# EAGLE board ModuleCarrier-Murata-ABZ-v1.0.0 (EAGLE 7.7.0)
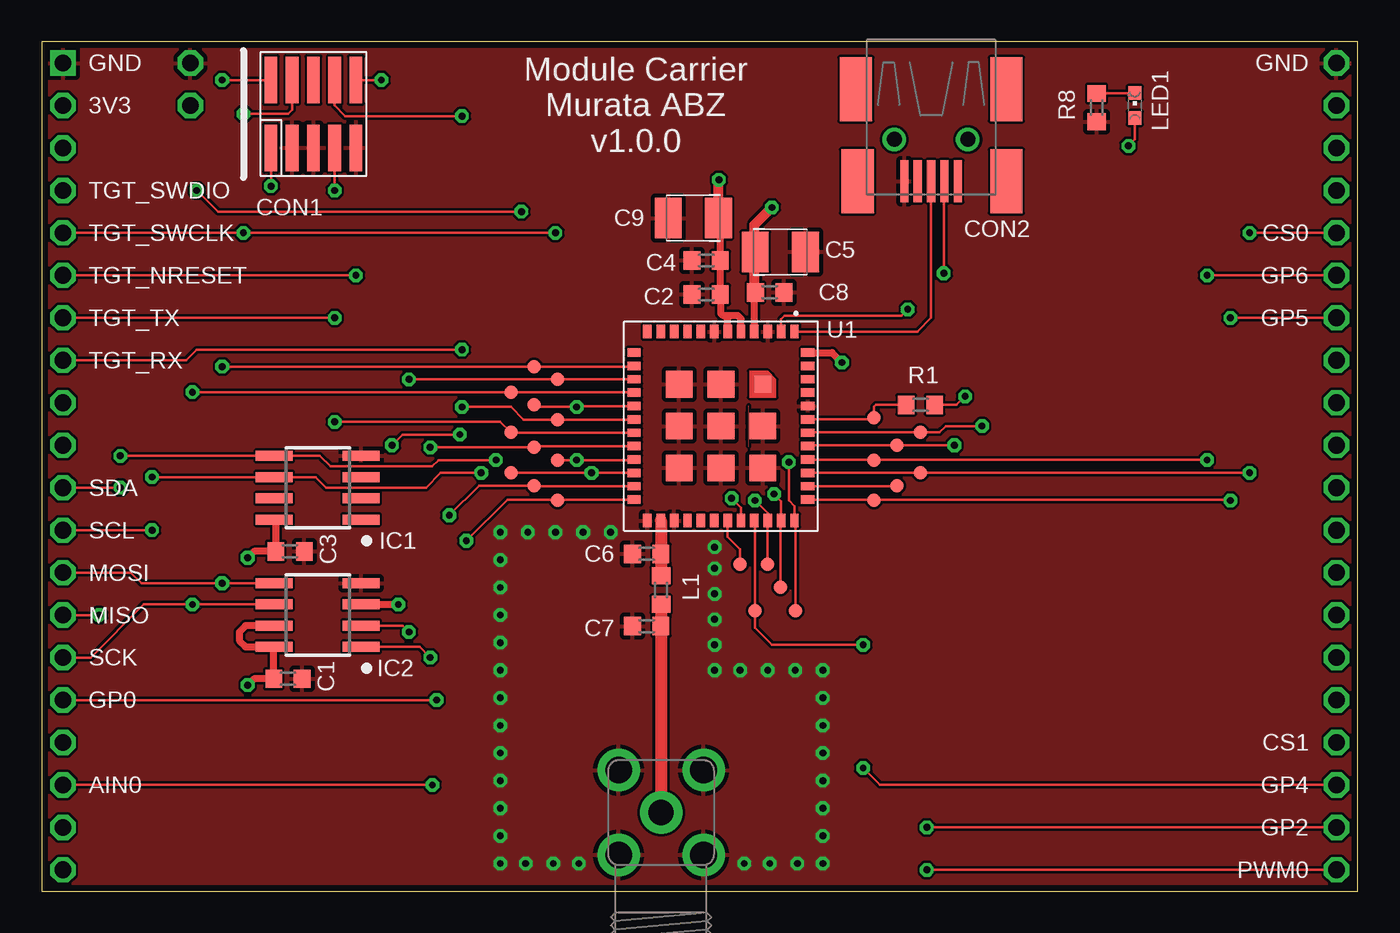
[diagram p0: board, top side]
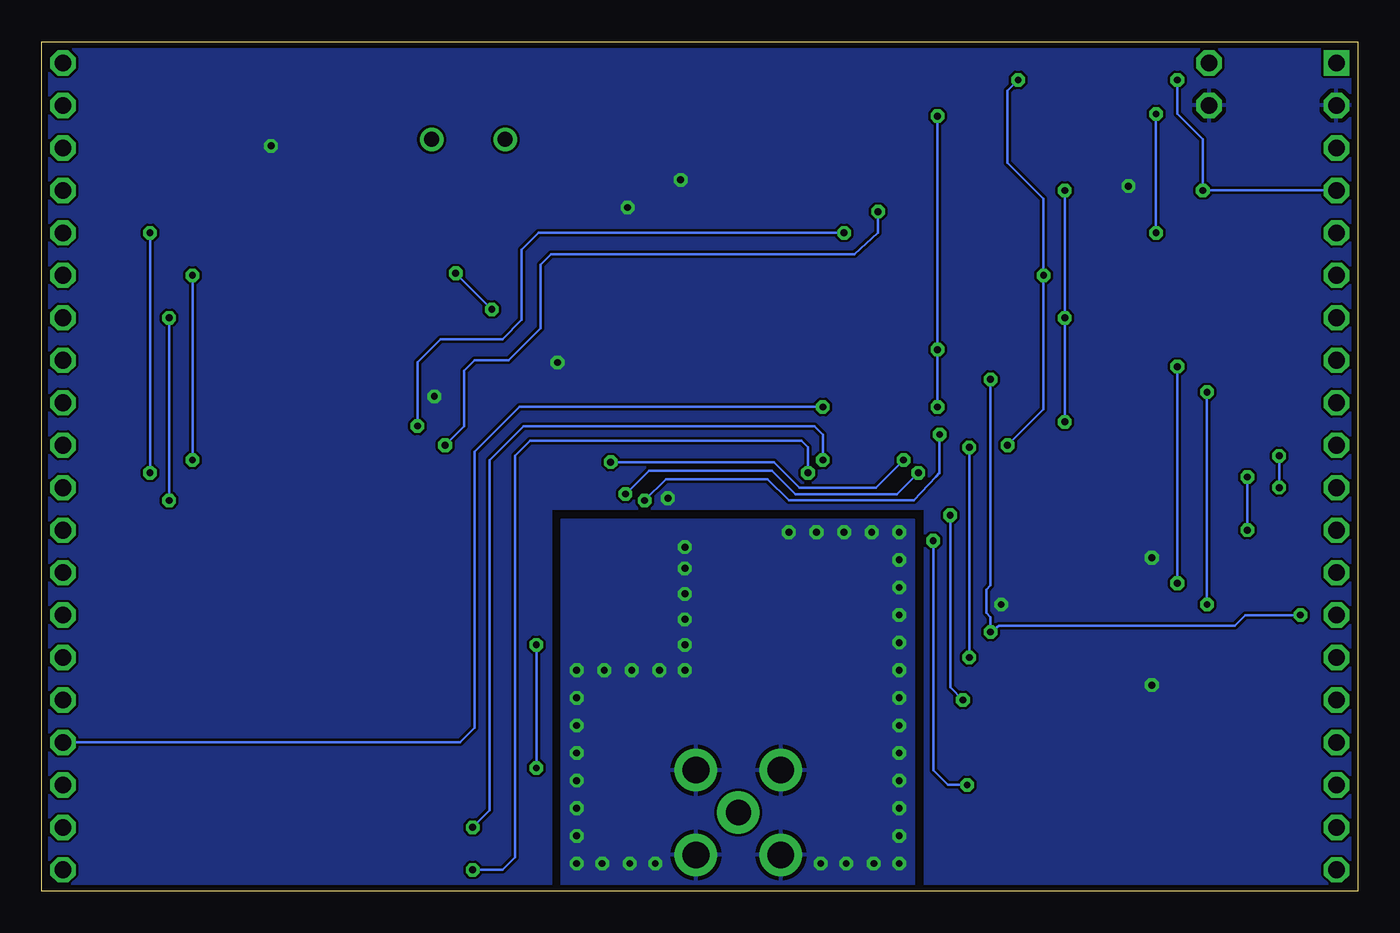
[diagram p1: board, bottom side, seen from below]

Size 78.74 x 50.8 mm. Coordinates in mm from the lower left corner, seen from the top.
Copper layers ((1*16)): Top 0.035mm / dielectric 0.8mm / Bottom 0.035mm
Design rules "mbed-HDK-6-6-2-layer *": minimum track width 6mil, minimum drill 9mil, track to track 6mil, track to pad 6mil, pad to pad 6mil, via to via 6mil, smd to smd 6mil, copper to edge 15mil, drill to drill 8mil, minimum pad ring 10mil, minimum via ring 8mil, stop-mask expansion 4mil, vias tented up to drill 0mil, thermal gap 10mil

## Footprints (pad centres in the part's own frame; a part is rotated, then mirrored left to right if it is on the bottom)
0603 = smd 1 x 1.1: 1 -0.85,0; 2 0.85,0
SMC_B = smd 1.6 x 2.4: + -1.5,0; - 1.5,0
FTSH-105-02 = smd 0.762 x 2.794: 1 0.381,-2.032; 2 0.381,2.032; 3 1.651,-2.032; 4 1.651,2.032; 5 2.921,-2.032; 6 2.921,2.032; 7 4.191,-2.032; 8 4.191,2.032; 9 5.461,-2.032; 10 5.461,2.032
USB-MINI-B-H = smd 2.5 x 0.5: D+ 2.5,0; D- 2.5,0.8; GND 2.5,-1.6; ID 2.5,-0.8; VBUS 2.5,1.6 | smd 3.81 x 1.93: GND@1 -3,4.5; GND@2 2.5,4.5; GND@3 -3,-4.5; GND@4 2.5,-4.4 | drill 0.9: P$5 0,2.2; P$6 0,-2.2
SO8 = smd 0.6 x 2.2: 1 -1.905,-2.6; 2 -0.635,-2.6; 3 0.635,-2.6; 4 1.905,-2.6; 5 1.905,2.6; 6 0.635,2.6; 7 -0.635,2.6; 8 -1.905,2.6
CHIPLED_0603 = smd 0.8 x 0.8: A 0,-0.75; C 0,0.75
MODULE_DAUGHTER = drill 1 square: 1 0,0 | drill 1 octagon: 2 0,-2.54; 3 0,-5.08; 4 0,-7.62; 5 0,-10.16; 6 0,-12.7; 7 0,-15.24; 8 0,-17.78; 9 0,-20.32; 10 0,-22.86; 11 0,-25.4; 12 0,-27.94; 13 0,-30.48; 14 0,-33.02; 15 0,-35.56; 16 0,-38.1; 17 0,-40.64; 18 0,-43.18; 19 0,-45.72; 20 0,-48.26; 21 76.2,-48.26; 22 76.2,-45.72; 23 76.2,-43.18; 24 76.2,-40.64; 25 76.2,-38.1; 26 76.2,-35.56; 27 76.2,-33.02; 28 76.2,-30.48; 29 76.2,-27.94; 30 76.2,-25.4; 31 76.2,-22.86; 32 76.2,-20.32; 33 76.2,-17.78; 34 76.2,-15.24; 35 76.2,-12.7; 36 76.2,-10.16; 37 76.2,-7.62; 38 76.2,-5.08; 39 76.2,-2.54; 40 76.2,0
TP50-PTH = drill 1 octagon: TP 0,0
TP08R = smd 0.8 x 0.8: TP 0,0
XCVR_CMWX1ZZABZ-078 = smd 0.8 x 0.5: 1 -5.65,4.4; 2 -5.65,3.6; 3 -5.65,2.8; 4 -5.65,2; 5 -5.65,1.2; 6 -5.65,0.4; 7 -5.65,-0.4; 8 -5.65,-1.2; 9 -5.65,-2; 10 -5.65,-2.8; 11 -5.65,-3.6; 12 -5.65,-4.4; 25 5.65,-4.4; 26 5.65,-3.6; 27 5.65,-2.8; 28 5.65,-2; 29 5.65,-1.2; 30 5.65,-0.4; 31 5.65,0.4; 32 5.65,1.2; 33 5.65,2; 34 5.65,2.8; 35 5.65,3.6; 36 5.65,4.4 | smd 0.5 x 0.8: 13 -4.4,-5.2; 14 -3.6,-5.2; 15 -2.8,-5.2; 16 -2,-5.2; 17 -1.2,-5.2; 18 -0.4,-5.2; 19 0.4,-5.2; 20 1.2,-5.2; 21 2,-5.2; 22 2.8,-5.2; 23 3.6,-5.2; 24 4.4,-5.2; 37 4.4,5.2; 38 3.6,5.2; 39 2.8,5.2; 40 2,5.2; 41 1.2,5.2; 42 0.4,5.2; 43 -0.4,5.2; 44 -1.2,5.2; 45 -2,5.2; 46 -2.8,5.2; 47 -3.6,5.2; 48 -4.4,5.2 | smd 1 x 1: 49 -2.5,2.5 | smd 1.6 x 1.6: 50 0,2.5; 51 2.5,2.5; 52 -2.5,0; 53 0,0; 54 2.5,0; 55 -2.5,-2.5; 56 0,-2.5; 57 2.5,-2.5
SMA90_DIP = drill 1.5 pad 2.54: ANTENNA 0,0 | drill 1.6 pad 2.54: GND1 -2.54,2.54; GND2 2.54,2.54; GND3 -2.54,-2.54; GND4 2.54,-2.54

## Placement (x,y rotation side)
C1  100nF  [0603]  14.73,12.7 0 top
C2  100nF  [0603]  39.75,35.69 180 top
C3  100nF  [0603]  14.86,20.32 0 top
C4  1uF  [0603]  39.75,37.72 180 top
C5  10uF  [SMC_B]  44.2,38.23 0 top
C6  3p7f  [0603]  36.2,20.17 180 top
C7  3p7F  [0603]  36.2,15.85 180 top
C8  100nF  [0603]  43.56,35.81 0 top
C9  10uF  [SMC_B]  38.99,40.26 180 top
CON1  SWD-10/TC2050_SMD  [FTSH-105-02]  13.33,46.48 0 top
CON2  10033526-N3212MLF  [USB-MINI-B-H]  53.21,44.96 270 top
IC1  ATECC608A  [SO8]  16.51,24.13 90 top
IC2  MX25R3235FM1IH0  [SO8]  16.51,16.51 90 top
L1  9n2H  [0603]  37.06,18.01 90 top
LED1  RED  [CHIPLED_0603]  65.41,46.99 0 top
MOD1  MODULE_DAUGHTER  [MODULE_DAUGHTER]  1.27,49.53 0 top
R1  10k  [0603]  52.58,29.08 0 top
R8  1k  [0603]  63.12,46.86 90 top
TP1  TEST-POINT-50R-PTH  [TP50-PTH]  8.89,46.99 0 top
TP2  TEST-POINT-50R-PTH  [TP50-PTH]  8.89,49.53 0 top
TP3  PTR1TP08R  [TP08R]  28.07,29.85 180 top
TP4  PTR1TP08R  [TP08R]  29.46,31.37 180 top
TP5  PTR1TP08R  [TP08R]  30.86,30.61 180 top
TP6  PTR1TP08R  [TP08R]  49.78,23.37 180 top
TP7  PTR1TP08R  [TP08R]  49.78,25.78 180 top
TP8  PTR1TP08R  [TP08R]  28.07,27.43 180 top
TP9  PTR1TP08R  [TP08R]  30.86,28.19 180 top
TP10  PTR1TP08R  [TP08R]  30.86,23.37 180 top
TP11  PTR1TP08R  [TP08R]  29.46,24.26 180 top
TP12  PTR1TP08R  [TP08R]  44.2,18.16 180 top
TP13  PTR1TP08R  [TP08R]  45.09,16.76 180 top
TP14  PTR1TP08R  [TP08R]  49.78,28.32 0 top
TP15  PTR1TP08R  [TP08R]  41.78,19.56 0 top
TP21  PTR1TP08R  [TP08R]  43.43,19.56 180 top
TP22  PTR1TP08R  [TP08R]  52.58,27.43 180 top
TP23  PTR1TP08R  [TP08R]  51.18,26.67 180 top
TP24  PTR1TP08R  [TP08R]  28.07,25.02 180 top
TP25  PTR1TP08R  [TP08R]  52.58,25.02 180 top
TP26  PTR1TP08R  [TP08R]  51.18,24.26 180 top
TP27  PTR1TP08R  [TP08R]  29.46,29.08 180 top
TP28  PTR1TP08R  [TP08R]  30.86,25.78 180 top
TP29  PTR1TP08R  [TP08R]  29.46,26.54 180 top
TP30  PTR1TP08R  [TP08R]  42.67,16.76 180 top
U1  CMWX1ZZABZ-078  [XCVR_CMWX1ZZABZ-078]  40.64,27.81 270 top
X1  SMACONNECTOR  [SMA90_DIP]  37.06,4.7 180 top

## Library data of the parts
C1-C4 C6-C8 L1 R1 R8 = mbed-HDK-RLC
C5 C9 = mbed-HDK-RLC; MF: Kemet; MFN: T491B106K020AT; OC-DIGIKEY: 399-8298-1-ND; OC-MOUSER: 80-T491B106K020; OC-NEWARK: 57K1740
CON1 = mbed-HDK-Connector
CON2 = mbed-HDK-Connector; MF: Amphenol FCI; MFN: 10033526-N3212MLF; OC-DIGIKEY: 609-4701-1-ND; OC-MOUSER: 649-10033526N3212MLF; OC-NEWARK: 14N2224
IC1 MOD1 TP3-TP15 TP21-TP30 = blackbriar
IC2 = blackbriar; MF: Macronix; MFN: MX25R3235FM2IH0; OC-DIGIKEY: 1092-1174-ND
LED1 = mbed-HDK-Optical; MF: Wurth Electronics Inc; MFN: 150060RS75000; OC-DIGIKEY: 732-4978-1-ND; OC-MOUSER: 710-150060RS75000; OC-NEWARK: 2322071
TP1 TP2 = mbed-HDK
U1 = CMWX1ZZABZ-078; AVAILABILITY: Good; DESCRIPTION: RF MODULE 860-930MHz 12.5x11.6x1.76mm 3.3Vdc; MF: Murata; MP: CMWX1ZZABZ-078; PACKAGE: Module Murata; PRICE: 13.62 USD
X1 = SMACONNECTOR; AVAILABILITY: Good; DESCRIPTION: CONNECTOR, SMA, ANTENNA; SVHC: No SVHC (19-Dec-2012); For Use With: Antenna; Kit Contents: SMA Connector; MF: LPRS; MP: SMA CONNECTOR; PACKAGE: None; PRICE: 1.06 USD

## Nets
+3.3V_TGT: C1.1 C2.1 C3.1 C4.1 C5.+ C8.1 C9.+ CON1.1 IC1.8 IC2.3 IC2.7 IC2.8 LED1.A MOD1.2 R1.2 TP1.TP U1.4 U1.5 U1.6 U1.32 U1.48
BLUE-LED: MOD1.23 TP30.TP U1.33
BUTTON: MOD1.16 TP11.TP U1.23
FLASH_!CS: IC2.1 TP29.TP U1.20
GND: C1.2 C2.2 C3.2 C4.2 C5.- C6.2 C7.2 C8.2 C9.- CON1.3 CON1.5 CON1.9 CON2.GND IC1.4 IC2.4 MOD1.1 MOD1.40 R8.1 TP2.TP U1.3 U1.7 U1.25 U1.27 U1.44 U1.49 U1.50 U1.51 U1.52 U1.53 U1.54 U1.55 U1.56 U1.57 X1.GND1 X1.GND2 X1.GND3 X1.GND4
GREEN-LED: MOD1.22 TP28.TP U1.21
LCD_!CS: MOD1.36 TP25.TP U1.39
LCD_!RESET: MOD1.35 TP7.TP U1.40
LCD_A0: MOD1.34 TP6.TP U1.37
MISO: IC2.2 MOD1.14 TP5.TP U1.15
MOSI: IC2.5 MOD1.13 TP4.TP U1.14
N$4: R1.1 TP14.TP U1.43
N$5: TP26.TP U1.38
N$7: C7.1 L1.1 X1.ANTENNA
N$8: C6.1 L1.2 U1.26
PA_1: LED1.C R8.2
POT: MOD1.18 TP10.TP U1.24
RED-LED: MOD1.21 TP24.TP U1.22
SCK: IC2.6 MOD1.15 TP3.TP U1.16
SCL: IC1.6 MOD1.12 TP12.TP U1.35
SD_!CS: MOD1.24 TP27.TP U1.17
SDA: IC1.5 MOD1.11 TP13.TP U1.36
STSAFE_NRST: TP15.TP U1.31
TGT_NRESET: CON1.10 MOD1.6 TP21.TP U1.34
TGT_RX: CON1.8 MOD1.8 TP9.TP U1.18
TGT_SWCLK: CON1.4 MOD1.5 TP22.TP U1.42
TGT_SWDIO: CON1.2 MOD1.4 TP23.TP U1.41
TGT_TX: CON1.7 MOD1.7 TP8.TP U1.19
USB-DM: CON2.D- U1.2
USB-DP: CON2.D+ U1.1

## Tracks (layer width: path | path; a pad name or v marks a point on that pad's centre or on a via)
+3.3V_TGT  (via drill 0.41)
  Top 0.152: R1.2 54.74,29.08 v55.25,29.59 | LED1.A 65.41,44.96 v65.02,44.58 | CON1.1 v13.72,42.16 | U1.32 41.84,22.93 v41.28,23.5
  Top 0.406: U1.5 41.84,34.23 41.66,34.42 41.15,34.42 | 41.15,34.42 40.77,34.42 40.64,34.54 40.64,35.65 C2.1 C4.1 40.6,40.15 C9.+ | U1.6 41.04,34.31 41.15,34.42 | U1.4 42.64,35.74 C8.1 | v12.32,19.94 12.7,20.32 C3.1 14.01,22.13 IC1.8 | v12.32,12.32 12.7,12.7 C1.1 13.88,14.58 IC2.8 12.19,14.61 11.81,14.99 11.81,15.49 12.19,15.88 IC2.7 | IC2.3 v21.34,17.15 | U1.48 47.29,32.21 v47.88,31.62
  Top 0.61: C9.+ 40.49,42.52 v40.51,42.55 | v43.69,40.89 42.64,39.85 42.64,38.17 | 42.64,35.89 C8.1 | 42.64,35.74 42.64,38.17 | 42.64,38.17 C5.+
  pour Bottom: 78.74,0 78.74,50.8 0,50.8 0,0 25.91,0 25.91,22.86 48.26,22.86 48.26,0
BLUE-LED  (via drill 0.41)
  Top 0.152: U1.33 42.67,22.16 TP30.TP 42.67,15.75 43.69,14.73 v49.15,14.73 | MOD1.23 50.17,6.35 v49.15,7.37
  Bottom 0.152: v49.15,7.37 v49.15,14.73
BUTTON  (via drill 0.41)
  Top 0.152: U1.23 29.46,24.21 | 29.46,24.21 TP11.TP 26.16,24.26 v24.38,22.48 | 29.46,24.21 29.42,24.26 | v23.62,11.43 MOD1.16
  Bottom 0.152: v24.38,22.48 24.38,12.19 v23.62,11.43
FLASH_!CS  (via drill 0.41)
  Top 0.152: U1.20 29.46,26.61 TP29.TP v23.24,26.54 | v23.24,13.97 22.61,14.61 IC2.1
  Bottom 0.152: v23.24,26.54 v23.24,13.97
GND  (via drill 0.41)
  other vias: 27.43,21.46 27.43,19.81 27.43,18.16 27.43,16.51 27.43,14.86 27.43,13.21 27.43,11.56 27.43,9.91 27.43,8.26 27.43,6.6 27.43,4.95 27.43,3.3 27.43,1.65 28.96,1.65 30.61,1.65 29.08,21.46 30.73,21.46 32.38,21.46 34.04,21.46 32.13,1.65 46.74,1.65 45.21,1.65 43.56,1.65 42.04,1.65 46.74,3.3 46.74,4.95 46.74,6.6 46.74,8.26 46.74,9.91 46.74,11.56 46.74,13.21 40.26,20.57 40.26,19.3 40.26,17.78 40.26,16.26 45.09,13.21 43.43,13.21 41.78,13.21 40.26,13.21 40.26,14.73
  pour Top: 0,0 78.74,0 78.74,50.8 0,50.8
  pour Bottom: 26.54,0 47.62,0 47.62,22.23 26.54,22.23
GREEN-LED  (via drill 0.41)
  Top 0.152: 30.86,25.81 TP28.TP v32,25.78 35.41,25.78 U1.21 | MOD1.22 v52.96,3.81
  Bottom 0.152: v32,25.78 32,27.3 32.51,27.81 49.91,27.81 51.94,25.78 51.94,4.83 v52.96,3.81
LCD_!CS  (via drill 0.41)
  Top 0.152: U1.39 TP25.TP v72.26,25.02 | v72.26,39.37 MOD1.36
  Bottom 0.152: v72.26,25.02 v72.26,39.37
LCD_!RESET  (via drill 0.41)
  Top 0.152: U1.40 49.78,25.81 | 49.78,25.81 TP7.TP | 49.78,25.81 69.69,25.81 v69.72,25.78 | v69.72,36.83 MOD1.35
  Bottom 0.152: v69.72,25.78 v69.72,36.83
LCD_A0  (via drill 0.41)
  Top 0.152: U1.37 49.78,23.41 | 49.78,23.41 TP6.TP | 49.78,23.41 71.08,23.41 v71.12,23.37 | v71.12,34.29 MOD1.34
  Bottom 0.152: v71.12,23.37 v71.12,34.29
MISO  (via drill 0.41)
  Top 0.152: U1.15 TP5.TP v21.97,30.61 | MOD1.14 v3.43,16.51 | v21.97,15.49 21.59,15.88 IC2.2
  Bottom 0.152: v3.43,16.51 6.73,16.51 7.37,15.88 21.46,15.88 v21.97,15.49 21.97,16.38 22.22,16.64 22.22,18.03 21.97,18.29 v21.97,30.61
MOSI  (via drill 0.41)
  Top 0.152: U1.14 35.44,31.37 TP4.TP v10.79,31.37 | MOD1.13 5.33,19.05 5.97,18.42 v10.79,18.42 IC2.5
  Bottom 0.152: v10.79,31.37 v10.79,18.42
N$4
  Top 0.152: U1.43 49.78,28.21 TP14.TP 49.78,28.96 49.91,29.08 R1.1
N$5
  Top 0.152: U1.38 51.18,24.21 TP26.TP
N$7
  Top 0.73: L1.1 37.05,17.16 C7.1 37.06,15.85 X1.ANTENNA
N$8
  Top 0.6: 37.04,20.07 C6.1 | 37.05,19.02 L1.2
  Top 0.73: U1.26 C6.1 | 37.04,20.07 37.06,20.07 L1.2
PA_1
  Top 0.152: R8.2 65.38,47.71 LED1.C
POT  (via drill 0.41)
  Top 0.152: U1.24 30.86,23.41 | 30.86,23.41 TP10.TP | v23.37,6.35 MOD1.18 | 30.86,23.41 27.86,23.41 v25.4,20.96
  Bottom 0.152: v25.4,20.96 25.4,7.24 24.51,6.35 v23.37,6.35
RED-LED  (via drill 0.41)
  Top 0.152: TP24.TP v32.89,25.02 U1.22 | MOD1.21 v52.96,1.27
  Bottom 0.152: v32.89,25.02 32.89,26.54 33.27,26.92 49.53,26.92 50.42,26.04 50.42,2.03 51.18,1.27 v52.96,1.27
SCK  (via drill 0.41)
  Top 0.152: U1.16 35.44,29.85 TP3.TP v9.02,29.85 | MOD1.15 2.92,13.97 6.1,17.15 v9.02,17.15 IC2.6
  Bottom 0.152: v9.02,29.85 v9.02,17.15
SCL  (via drill 0.41)
  Top 0.152: TP12.TP 44.2,22.16 U1.35 44.24,23.32 v43.82,23.75 | MOD1.12 v6.6,21.59 | v6.6,24.77 IC1.6 16.38,24.77 17.02,24.13 22.99,24.13 23.88,25.02 v26.29,25.02
  Bottom 0.152: v6.6,21.59 v6.6,24.77 | v26.29,25.02 27.56,23.75 33.66,23.75 35.05,25.15 42.42,25.15 v43.82,23.75
SD_!CS  (via drill 0.41)
  Top 0.152: 29.46,29.01 TP27.TP 29.59,28.96 v32,28.96 31.95,29.01 U1.17
  Bottom 0.152: MOD1.24 53.72,8.89 52.83,9.78 52.83,26.29 50.17,28.96 v32,28.96
SDA  (via drill 0.41)
  Top 0.152: TP13.TP 45.09,22.16 U1.36 45.04,23.03 44.7,23.37 v44.7,25.65 | MOD1.11 v4.7,24.13 | v4.7,26.04 IC1.5 16.64,26.04 17.27,25.4 23.37,25.4 23.75,25.78 v27.18,25.78
  Bottom 0.152: v4.7,24.13 v4.7,26.04 | v44.7,25.65 34.93,25.65 33.4,24.13 28.83,24.13 v27.18,25.78
STSAFE_NRST
  Top 0.152: U1.31 41.04,21.19 41.78,20.45 TP15.TP
TGT_NRESET  (via drill 0.41)
  Top 0.152: U1.34 TP21.TP | MOD1.6 v18.8,36.83 | U1.34 | U1.34 43.44,22.6 v42.67,23.37 | v25.02,27.3 21.59,27.3 v20.95,26.67 | v20.32,48.51 CON1.10
  Bottom 0.152: 25.25,24.77 26.54,23.37 34.04,23.37 35.31,24.64 41.4,24.64 v42.67,23.37 | 25.25,24.77 25.02,25.02 | v25.02,27.3 25.02,25 25.25,24.77 | v20.95,26.67 18.8,28.83 v18.8,36.83 18.8,41.4 20.95,43.56 20.95,47.88 v20.32,48.51
TGT_RX  (via drill 0.41)
  Top 0.152: U1.18 35.44,28.19 TP9.TP 28.83,28.19 28.07,28.96 v25.15,28.96 | MOD1.8 8.64,31.75 9.27,32.39 v25.15,32.39 | CON1.8 17.53,46.99 18.16,46.36 v25.15,46.36
  Bottom 0.152: v25.15,28.96 v25.15,32.39 v25.15,46.36
TGT_SWCLK  (via drill 0.41)
  Top 0.152: 52.58,27.41 TP22.TP | MOD1.5 v12.06,39.37 v30.73,39.37 | TP22.TP 53.72,27.43 54.1,27.81 v56.26,27.81 | TP22.TP 45.86,27.43 U1.42 | v12.06,46.48 14.73,46.48 14.99,46.74 CON1.4
  Bottom 0.152: v30.73,39.37 49.02,39.37 50.04,38.35 50.04,34.16 51.18,33.02 54.86,33.02 56.26,31.62 v56.26,27.81 | v12.06,39.37 v12.06,46.48
TGT_SWDIO  (via drill 0.41)
  Top 0.152: 51.18,26.61 TP23.TP | v9.27,41.91 10.54,40.64 v28.7,40.64 | U1.41 45.9,26.67 TP23.TP | v54.61,26.67 TP23.TP | CON1.2 v10.79,48.51
  Bottom 0.152: v10.79,48.51 10.79,46.48 9.27,44.96 v9.27,41.91 MOD1.4 | v28.7,40.64 28.7,39.37 30.1,38.1 48.26,38.1 48.9,37.47 48.9,33.66 50.8,31.75 52.83,31.75 53.47,31.12 53.47,27.81 v54.61,26.67
TGT_TX  (via drill 0.41)
  Top 0.152: U1.19 28.07,27.41 TP8.TP 27.43,28.07 v17.53,28.07 | v17.53,41.91 CON1.7 | MOD1.7 v17.53,34.29
  Bottom 0.152: v17.53,28.07 v17.53,34.29 v17.53,41.91
USB-DM  (via drill 0.41)
  Top 0.152: U1.2 44.24,34.21 44.45,34.42 51.44,34.42 v51.82,34.8 | v53.98,36.96 53.98,42.42 CON2.D-
  Bottom 0.152: v51.82,34.8 v53.98,36.96
USB-DP
  Top 0.152: U1.1 52.39,33.46 53.21,34.29 CON2.D+

## Text on the board
tPlace: GND / 3V3 / / TGT_SWDIO / TGT_SWCLK / TGT_NRESET / TGT_TX / TGT_RX / / / SDA / SCL / MOSI / MISO / SCK / GP0 / / AIN0 | GND / / / / CS0 / GP6 / GP5 / / / / / / / / / / CS1 / GP4 / GP2 / PWM0 | Module Carrier / Murata ABZ / v1.0.0